# Altium PCB PCB_boost_converter_1_2024-08-31.pcbdoc
Units mm, origin at the board's own origin, x right, y up, seen from the top; angles counter-clockwise.
Board outline 70.87 x 79.5 mm, 2 copper layers (Top Layer, Bottom Layer); 25 components, 17 nets, 61 pads, 193 vias.
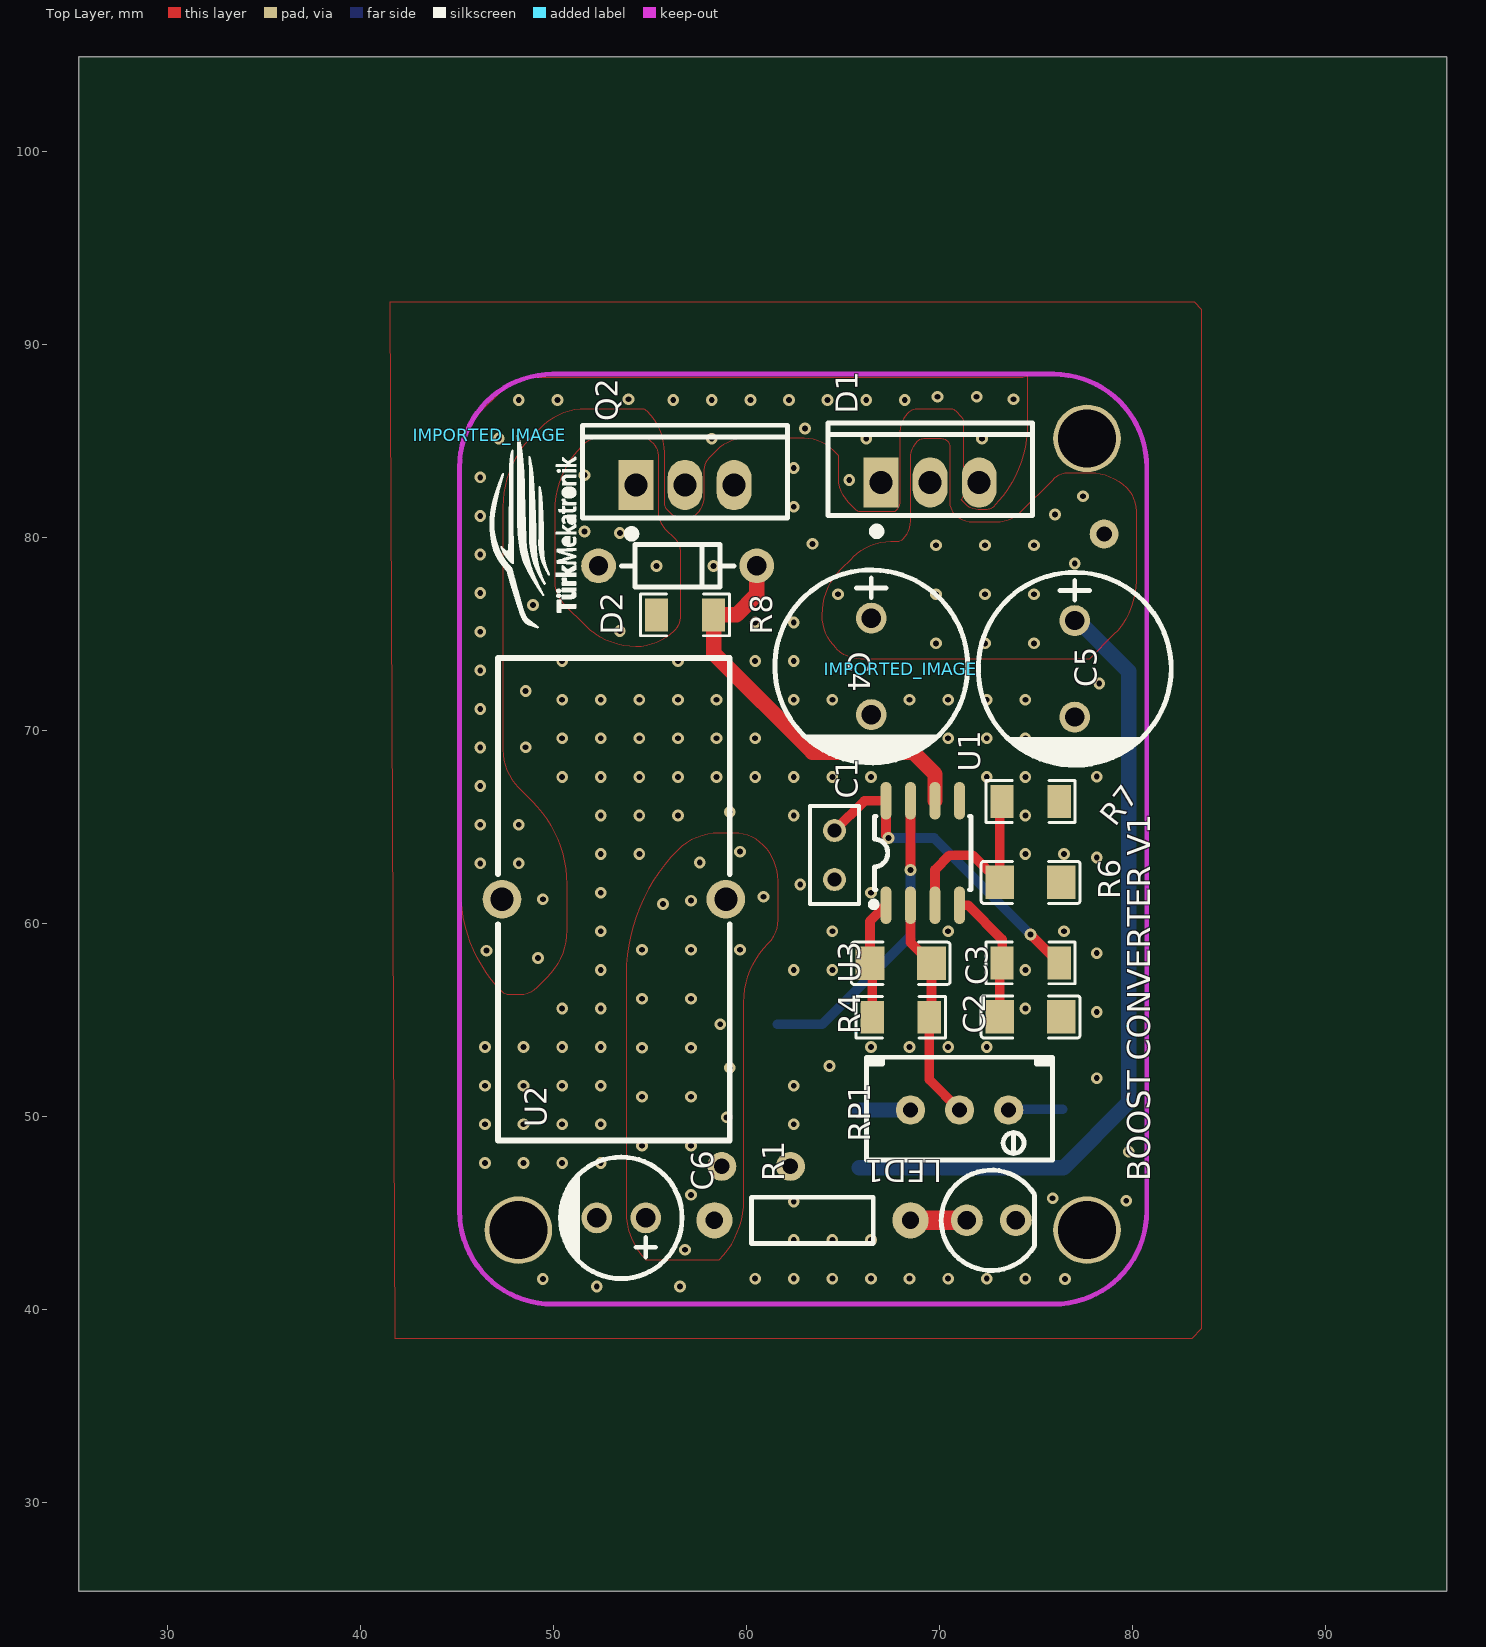
[diagram p0: Top Layer view]
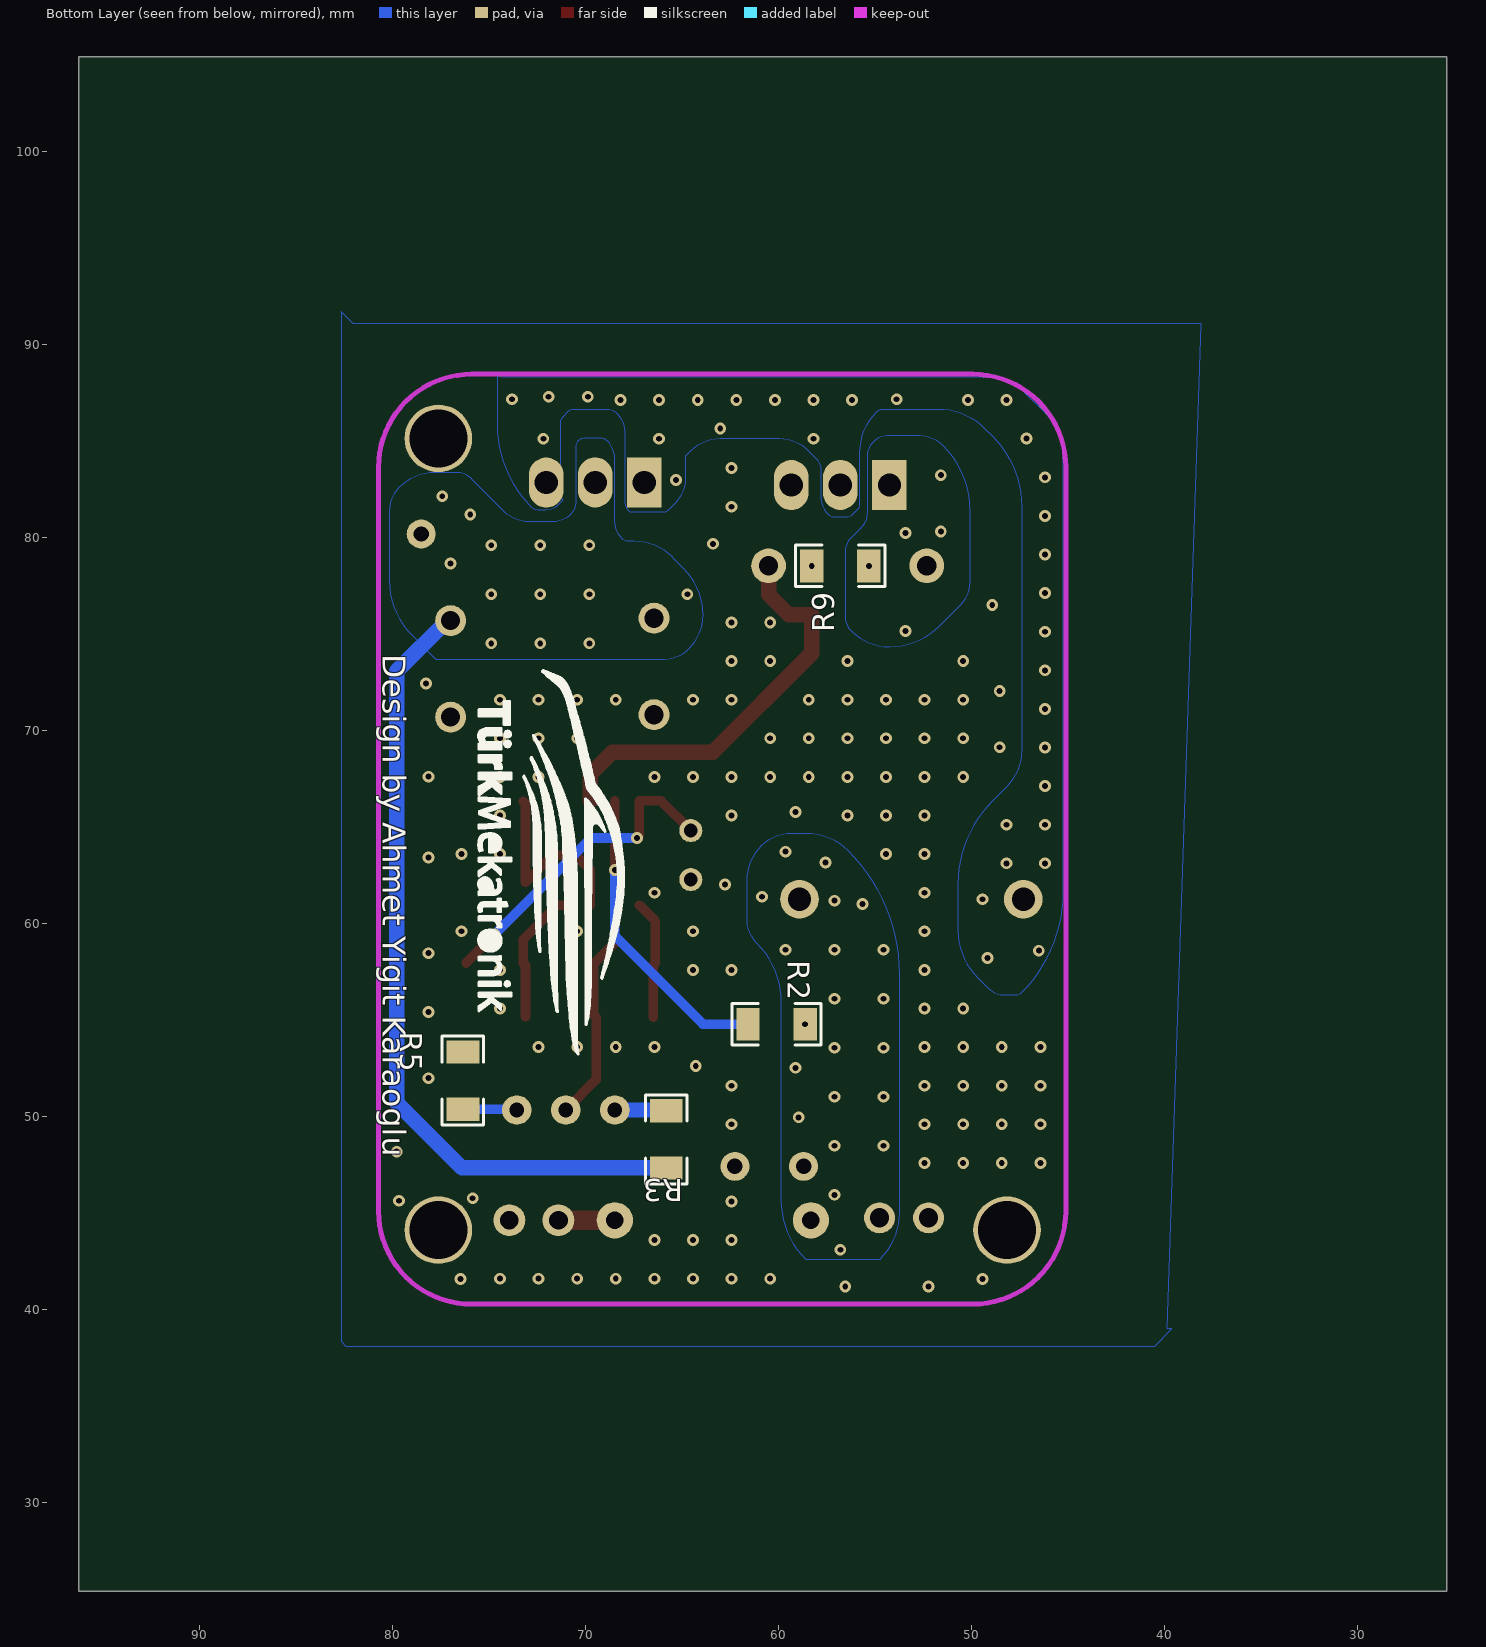
[diagram p1: Bottom Layer view, seen from below]

## Layer stack, top to bottom
Top Layer: signal copper (thickness not stored)
Dielectric: dielectric 0.32, FR-4, Dk 4.8
Bottom Layer: signal copper (thickness not stored)

## Board outline
96.266,25.4 25.4,25.4 25.4,104.902 96.266,104.902

## Components (designator, comment, footprint, x,y, rotation, side; value= is the part's Value field where it differs from the comment)
C1 "100nF" RAD-0.1 64.556,63.54 r90 top
C2 "2.2nF" C1206 74.716,55.158 r180 top
C3 "100nF" C1206 74.716,62.125 r180 top
C4 "100uF" CAP-TH_BD10.0-P5.00-D0.6-FD 66.461,73.319 r270 top
C5 "100uF" CAP-TH_BD10.0-P5.00-D0.6-FD 77.002,73.192 r270 top
C6 "100uF" CAP-TH_BD6.3-P2.50-D1.0-FD 53.507,44.744 r180 top
D1 "MBR20100CL" TO-220-3_L10.0-W4.5-P2.54-L 69.509,82.844 r0 top
D2 "PH1N4148TB" DO-35_BD2.0-L4.2-P8.20-D0.5-R-RD 56.428,78.526 r180 top
IMPORTED_IMAGE "IMPORTED_IMAGE" IMPORTED_IMAGE 67.975,73.158 r0 top
IMPORTED_IMAGE "IMPORTED_IMAGE" IMPORTED_IMAGE 46.686,85.303 r0 top
LED1 "LED-TH-5mm_R" LED-TH_BD5.0_RED 72.684,44.617 r90 top
Q2 "IRF3205PBF" TO-220-3_L10.0-W4.5-P2.54-L 56.809,82.717 r0 top
R1 "1k" R_AXIAL-0.4 63.413,44.617 r180 top
R2 "10" R1206#1 60.111,54.777 r0 bottom
R3 "1k" R1206#1 65.826,48.808 r90 bottom
R4 "100k" R1206#2 67.985,55.14 r0 top
R5 "1k" R1206#1 76.367,51.856 r90 bottom
R6 "1k" R1206#2 74.716,57.952 r0 top
R7 "10k" R1206#2 74.716,66.316 r180 top
R8 "10" R1206#2 56.809,75.986 r0 top
R9 "100k" R1206#1 56.809,78.526 r0 bottom
RP1 "10k" RES-ADJ-TH_3296W 71.033,50.332 r270 top
U1 "UC3845BDTR(XBLW)" SOIC-8_L5.0-W4.0-P1.27-LS6.0-BL 69.128,63.649 r0 top
U2 "150UH/3A" 150UH/3A 53.126,61.254 r90 top
U3 "100nF" C1206 67.985,57.934 r180 top

## Footprints (in the part's own frame and the unit in brackets; to place one, negate y for a bottom-side part, rotate by r counter-clockwise, add the part's x,y. Pads: shape width x height; smd on the part's side, far side on the other; paste and mask are expansions set on the pad)
150UH/3A [mm]
  round 2 hole 1.199 paste+0 mask+0.05: 1(0,-5.8)
  round 2 hole 1.2 paste+0 mask+0.05: 2(0,5.8)
  silkscreen extent -12.5,-6 12.5,6
C1206 [mm]
  rect 1.485x1.728 smd paste-100 mask+0.051: 1(-1.593,0) 2(1.593,0)
  silkscreen extent -2.56,-1.09 2.56,1.09
CAP-TH_BD6.3-P2.50-D1.0-FD [mm]
  round 1.6 hole 1 paste+0 mask+0.051: 1(-1.27,0) 2(1.27,0)
  silkscreen extent -3.15,-3.15 3.17,3.15
CAP-TH_BD10.0-P5.00-D0.6-FD [mm]
  round 1.6 hole 1 paste+0 mask+0.05: 1(-2.5,0) 2(2.5,0)
  silkscreen extent -5,-5 5.08,5
DO-35_BD2.0-L4.2-P8.20-D0.5-R-RD [mm]
  round 1.8 hole 1 paste+0 mask+0.051: 1(4.1,0) 2(-4.1,0)
  silkscreen extent -2.92,-1.1 2.92,1.1
IMPORTED_IMAGE [mm]
LED-TH_BD5.0_RED [mil]
  round 65 hole 38 paste+0 mask+2: 1(0,50) 2(0,-50)
  silkscreen extent -102,-88 102,102
R1206#1 [mm]
  rect 1.208x1.701 smd paste-100 mask+0.051: 1(1.479,0) 2(-1.479,0)
  silkscreen extent -2.31,-1.08 2.31,1.08
R1206#2 [mm]
  rect 1.208x1.701 smd paste-100 mask+0.051: 1(-1.479,0) 2(1.479,0)
  silkscreen extent -2.31,-1.08 2.31,1.08
R_AXIAL-0.4 [mil]
  round 74 hole 35.4 paste+0 mask+2: 1(-200,0) 2(200,0)
  silkscreen extent -124,-47 124,47
RAD-0.1 [mil]
  round 47 hole 28 paste+0 mask+2: 1(-50,0) 2(50,0)
  silkscreen extent -100,-50 100,50
RES-ADJ-TH_3296W [mil]
  round 60 hole 30 paste+0 mask+2: 1(0,100.01) 2(0,0.01) 3(0,-99.99)
  silkscreen extent -108,-190 102,190
SOIC-8_L5.0-W4.0-P1.27-LS6.0-BL [mil]
  oval 22.38x76.78 smd paste+0 mask+2: 1(-75,-106.5) 2(-25,-106.5) 3(25,-106.5) 4(75,-106.5) 5(75,106.5) 6(25,106.5) 7(-25,106.5) 8(-75,106.5)
  silkscreen extent -106,-111 98,75
TO-220-3_L10.0-W4.5-P2.54-L [mm]
  rect 1.8x2.6 hole 1.2 paste+0 mask+0.051: 1(-2.54,0.005)
  oval 1.8x2.6 hole 1.2 paste+0 mask+0.051: 2(0,0.005) 3(2.54,-0.005)
  silkscreen extent -5.3,-2.73 5.3,3.09

## Free pads (board coordinates)
  round 3.5 hole 3 paste+0 mask+0.051: 4(48.173,44.109) 4(77.637,44.108) 4(77.637,85.13)
  round 1.5 hole 0.8 paste+0 mask+0.051: 5(58.714,47.411) 5(62.27,47.411) 5(78.526,80.177)

## Via types
v1: diameter 0.61, hole 0.305, Top Layer to Bottom Layer, tented both sides, 189 vias
v2: diameter 0.62, hole 0.31, Top Layer to Bottom Layer, tented both sides, 4 vias

## Nets (pads, with @x,y where several pads share a name; then routed paths per layer and width w, separated by ;. In a path a pad name is that pad's centre, name@x,y a point inside that pad or via, vN(x,y) a via of type N, cw(c..) or ccw(c..) an arc to the next point about the centre after c; other vN are vias at no path point)
D1_1: D1.1 D1.3 Q2.2 U2.2
  other v1: 49.189,58.206 46.522,58.587 49.443,61.254 46.198,63.114 48.198,63.114 46.198,65.114 48.198,65.114 46.198,67.114 46.198,69.114 46.198,71.114 46.198,73.114 46.198,75.114 46.198,77.114 46.198,79.114 46.198,81.114 65.318,82.971 46.198,83.114 58.197,85.114 66.197,85.114 72.197,85.114 47.157,85.13 63.032,85.638 48.198,87.114 50.198,87.114 56.197,87.114 58.197,87.114 60.197,87.114 62.197,87.114 64.197,87.114 66.197,87.114 68.197,87.114 53.888,87.162 73.827,87.162 69.89,87.289 71.922,87.289
GND: C1.1 C2.1 C3.1 C4.2 C5.2 C6.2 LED1.2 pad.5@62.27,47.411 Q2.3 R5.1 R7.1 R9.1 U1.5
  other v1: 52.237,41.188 56.555,41.188 49.443,41.569 60.443,41.591 62.443,41.591 64.443,41.591 66.443,41.591 68.443,41.591 70.443,41.591 72.443,41.591 74.443,41.591 76.494,41.569 62.443,43.591 64.443,43.591 66.443,43.591 62.443,45.591 79.669,45.633 75.859,45.76 46.443,47.591 48.443,47.591 50.443,47.591 52.443,47.591 79.796,48.173 46.443,49.591 48.443,49.591 50.443,49.591 52.443,49.591 62.443,49.591 46.443,51.591 48.443,51.591 50.443,51.591 52.443,51.591 62.443,51.591 78.145,51.983 64.302,52.618 46.443,53.591 48.443,53.591 50.443,53.591 52.443,53.591 66.443,53.591 68.443,53.591 70.443,53.591 72.443,53.591 78.145,55.412 50.443,55.591 52.443,55.591 74.443,55.591 52.443,57.591 62.443,57.591 64.443,57.591 74.443,57.591 78.145,58.46 52.443,59.591 64.443,59.591 70.443,59.591 76.443,59.591 52.443,61.591 66.443,61.591 62.778,62.016 78.145,63.413 52.443,63.591 54.443,63.591 74.443,63.591 76.443,63.591 52.443,65.591 54.443,65.591 56.443,65.591 62.443,65.591 74.443,65.591 59.126,65.774 50.443,67.591 52.443,67.591 54.443,67.591 56.443,67.591 58.443,67.591 60.443,67.591 62.443,67.591 64.443,67.591 66.443,67.591 72.443,67.591 74.443,67.591 78.145,67.604 48.554,69.128 50.443,69.591 52.443,69.591 54.443,69.591 56.443,69.591 58.443,69.591 60.443,69.591 70.443,69.591 72.443,69.591 74.443,69.591 50.443,71.591 52.443,71.591 54.443,71.591 56.443,71.591 58.443,71.591 62.443,71.591 64.443,71.591 68.443,71.591 70.443,71.591 72.443,71.591 74.443,71.591 48.554,72.049 78.272,72.43 50.443,73.591 56.443,73.591 60.443,73.591 62.443,73.591 60.443,75.591 62.443,75.591 48.935,76.494 58.288,78.526 63.413,79.669 62.443,81.591 62.443,83.591
OUTPUT: D2.2 R8.2 U1.6 | length 21.6
  Top Layer w0.8: D2.2 60.528,77.037 59.476,75.986 R8.2 58.288,73.999 63.413,68.874 68.62,68.874 69.763,67.731 U1.6
Q2_1: D2.1 Q2.1 R8.1 R9.2
  other v1: 53.431,75.148 53.431,80.228 51.602,80.304 51.602,83.225
  other v2: 55.331,78.526
R1_1: LED1.1 R1.1 | length 2.9
  Top Layer w1: R1.1 LED1.1
R3_1: R3.1 RP1.3 | length 2.7
  Bottom Layer w0.8: R3.1 65.872,50.332 RP1.3
RP1_1: R5.2 RP1.1 | length 2.8
  Bottom Layer w0.5: RP1.1 73.619,50.377 R5.2
RT/CT: C2.2 R6.1 U1.4 | length 7
  Top Layer w0.5: U1.4 71.47,60.944 73.238,59.176 R6.1 ; C2.2 73.124,57.838 R6.1
S$133: 
S$1126: 
U1_1: R4.1 U1.1 U3.2 | length 6.2
  Top Layer w0.5: R4.1 66.507,57.82 U3.2 66.393,60.113 U1.1
U1_2: R4.2 RP1.2 U1.2 U3.1 | length 11.8
  Top Layer w0.5: U1.2 68.493,59.019 U3.1 69.578,55.254 R4.2 69.464,51.901 RP1.2
U1_3: C3.2 R7.2 U1.3 | length 10.3
  Top Layer w0.5: U1.3 69.763,62.778 70.525,63.54 71.709,63.54 C3.2 ; C3.2 73.123,66.202 R7.2
U1_8: C1.2 R6.2 U1.8 | length 16.9
  Top Layer w0.5: C1.2 66.101,66.354 U1.8 67.223,64.556 v2(67.35,64.429) ; v2@74.716,59.476 v2(74.716,59.43) R6.2
  Bottom Layer w0.5: v2(67.35,64.429) 69.718,64.429 v2(74.716,59.43)
VCC: R2.1 U1.7 | length 15.8
  Top Layer w0.5: v2(68.493,62.778) U1.7
  Bottom Layer w0.5: R2.1 63.921,54.777 68.493,59.349 v2(68.493,62.778)
VIN: C6.1 pad.5@58.714,47.411 R1.2 R2.2 U2.1
  other v1: 56.809,43.093 57.114,45.938 54.574,48.478 57.114,48.478 58.968,49.951 54.574,51.018 57.114,51.018 59.126,52.517 54.574,53.558 57.114,53.558 58.633,54.777 54.574,56.098 57.114,56.098 54.574,58.638 57.114,58.638 59.654,58.638 55.666,61 57.114,61.178 60.873,61.381 57.571,63.159 59.654,63.718
VOUT: C4.1 C5.1 D1.2 pad.5@78.526,80.177 R3.2 | length 41.6
  Bottom Layer w0.8: R3.2 76.413,47.329 79.796,50.713 79.796,73.065 77.169,75.691 C5.1
  other v1: 69.815,74.513 72.355,74.513 74.895,74.513 64.735,77.053 69.815,77.053 72.355,77.053 74.895,77.053 77.002,78.653 69.815,79.593 72.355,79.593 74.895,79.593 75.986,81.193 77.435,82.133

## Polygon pours and split planes (outlines as drawn)
Q2_1 on Bottom Layer (solid): 56.301,75.224 56.221,75.143 cw(c54.269,77.094) 54.269,74.335 cw(c54.269,78.014) 51.668,75.412 50.586,76.494 cw(c51.813,77.72) 50.078,77.72 50.078,79.288 50.078,81.376 cw(c54.848,81.376) 51.475,84.749 cw(c52.702,83.522) 52.702,85.257 54.396,85.257 cw(c54.396,84.337) 55.047,84.987 55.158,84.876 cw(c54.545,84.262) 55.412,84.262 55.412,81.32 ccw(c56.639,81.32) 55.772,80.452 56.301,79.923 cw(c55.688,79.309) 56.555,79.309 56.555,77.764 56.555,75.837 cw(c55.688,75.837) 56.301,75.224
VIN on Bottom Layer (solid): 58.587,42.585 ccw(c55.521,45.651) 59.857,45.651 59.857,54.523 59.857,55.901 cw(c64.193,55.901) 61.127,58.968 ccw(c59.901,60.194) 61.635,60.194 61.635,61.762 61.635,62.208 ccw(c59.034,62.208) 60.873,64.048 ccw(c59.34,62.515) 59.34,64.683 58.841,64.683 58.575,64.683 ccw(c58.575,61.647) 56.428,63.794 ccw(c62.867,57.355) 53.761,57.355 53.761,47.284 53.761,45.037 ccw(c57.23,45.037) 54.777,42.585 58.587,42.585
VOUT on Bottom Layer (solid): 77.637,73.7 65.91,73.7 cw(c65.91,75.434) 64.683,74.208 64.64,74.251 cw(c66.374,75.986) 63.921,75.986 cw(c67.294,75.986) 64.909,78.37 65.445,78.907 65.526,78.987 cw(c67.477,77.036) 67.477,79.796 67.806,79.796 ccw(c67.806,80.229) 68.112,79.923 ccw(c67.193,80.842) 68.493,80.842 68.493,83.098 68.493,84.083 cw(c69.794,84.083) 68.874,85.003 cw(c69.181,84.696) 69.181,85.13 69.763,85.13 70.092,85.13 cw(c70.092,84.696) 70.398,85.003 cw(c70.092,84.696) 70.525,84.696 70.525,81.955 70.525,81.806 ccw(c71.393,81.806) 70.779,81.193 ccw(c71.699,82.112) 71.699,80.812 72.938,80.812 ccw(c72.938,82.651) 74.239,81.35 75.859,82.971 75.971,83.082 cw(c76.621,82.432) 76.621,83.352 77.83,83.352 cw(c77.83,80.75) 79.669,82.59 cw(c78.443,81.363) 80.177,81.363 80.177,77.764 cw(c76.192,77.764) 79.01,74.945 77.764,73.7
D1_1 on Bottom Layer (solid): 74.589,88.432 74.589,85.866 cw(c68.519,85.866) 72.811,81.574 cw(c72.505,81.88) 72.505,81.447 72.049,81.447 cw(c72.049,82.366) 71.399,81.716 71.16,81.955 ccw(c70.854,82.261) 71.287,82.261 71.287,86.019 ccw(c70.981,86.019) 71.198,86.235 70.906,86.527 ccw(c70.6,86.22) 70.6,86.654 68.874,86.654 ccw(c68.874,86.04) 68.441,86.474 68.366,86.4 ccw(c69.286,85.48) 67.985,85.48 67.985,82.844 67.985,81.933 cw(c67.118,81.933) 67.731,81.32 65.953,81.32 cw(c65.953,81.626) 65.737,81.409 65.318,81.828 cw(c66.545,83.054) 64.81,83.054 64.81,84.241 64.556,84.495 ccw(c63.023,82.962) 63.023,85.13 59.984,85.13 ccw(c59.984,82.983) 58.467,84.501 58.079,84.114 ccw(c58.693,83.5) 57.825,83.5 57.825,82.209 57.825,82.112 cw(c56.525,82.112) 57.444,81.193 cw(c57.138,81.499) 57.138,81.066 56.555,81.066 cw(c56.555,81.679) 56.122,81.245 55.92,81.447 cw(c56.227,81.753) 55.793,81.753 55.793,84.368 55.793,84.38 ccw(c52.758,84.38) 54.904,86.527 ccw(c54.598,86.22) 54.598,86.654 51.729,86.654 ccw(c51.729,83.281) 49.345,85.666 48.935,85.257 ccw(c52.615,81.577) 47.411,81.577 47.411,69.001 ccw(c50.171,69.001) 48.22,67.049 48.935,66.334 cw(c44.643,62.041) 50.713,62.041 50.713,61.381 50.713,59.642 cw(c47.245,59.642) 49.697,57.19 49.168,56.66 cw(c48.3,57.527) 48.3,56.301 47.718,56.301 cw(c47.718,56.734) 47.411,56.428 cw(c52.624,61.64) 45.252,61.64 45.252,72.176 45.252,84.433 cw(c47.854,84.433) 46.014,86.273 47.508,87.766 cw(c48.808,86.465) 48.808,88.305 74.283,88.305 ccw(c74.283,88.738) 74.589,88.432
GND on Bottom Layer (solid): 38.1,91.059 82.042,91.059 82.677,91.694 82.677,38.354 82.423,38.1 40.513,38.1 39.624,38.989 39.878,38.989
Q2_1 on Top Layer (solid): 56.301,75.224 56.221,75.143 cw(c54.269,77.094) 54.269,74.335 cw(c54.269,78.014) 51.668,75.412 50.586,76.494 cw(c51.813,77.72) 50.078,77.72 50.078,79.288 50.078,81.376 cw(c54.848,81.376) 51.475,84.749 cw(c52.702,83.522) 52.702,85.257 54.396,85.257 cw(c54.396,84.337) 55.047,84.987 55.158,84.876 cw(c54.545,84.262) 55.412,84.262 55.412,81.32 ccw(c56.639,81.32) 55.772,80.452 56.301,79.923 cw(c55.688,79.309) 56.555,79.309 56.555,77.764 56.555,75.837 cw(c55.688,75.837) 56.301,75.224
VIN on Top Layer (solid): 58.587,42.585 ccw(c55.521,45.651) 59.857,45.651 59.857,54.523 59.857,55.901 cw(c64.193,55.901) 61.127,58.968 ccw(c59.901,60.194) 61.635,60.194 61.635,61.762 61.635,62.208 ccw(c59.034,62.208) 60.873,64.048 ccw(c59.34,62.515) 59.34,64.683 58.841,64.683 58.575,64.683 ccw(c58.575,61.647) 56.428,63.794 ccw(c62.867,57.355) 53.761,57.355 53.761,47.284 53.761,45.037 ccw(c57.23,45.037) 54.777,42.585 58.587,42.585
VOUT on Top Layer (solid): 77.637,73.7 65.91,73.7 cw(c65.91,75.434) 64.683,74.208 64.64,74.251 cw(c66.374,75.986) 63.921,75.986 cw(c67.294,75.986) 64.909,78.37 65.445,78.907 65.526,78.987 cw(c67.477,77.036) 67.477,79.796 67.806,79.796 ccw(c67.806,80.229) 68.112,79.923 ccw(c67.193,80.842) 68.493,80.842 68.493,83.098 68.493,84.083 cw(c69.794,84.083) 68.874,85.003 cw(c69.181,84.696) 69.181,85.13 69.763,85.13 70.092,85.13 cw(c70.092,84.696) 70.398,85.003 cw(c70.092,84.696) 70.525,84.696 70.525,81.955 70.525,81.806 ccw(c71.393,81.806) 70.779,81.193 ccw(c71.699,82.112) 71.699,80.812 72.938,80.812 ccw(c72.938,82.651) 74.239,81.35 75.859,82.971 75.971,83.082 cw(c76.621,82.432) 76.621,83.352 77.83,83.352 cw(c77.83,80.75) 79.669,82.59 cw(c78.443,81.363) 80.177,81.363 80.177,77.764 cw(c76.192,77.764) 79.01,74.945 77.764,73.7
D1_1 on Top Layer (solid): 74.548,88.432 74.548,85.866 cw(c68.477,85.866) 72.77,81.574 cw(c72.463,81.88) 72.463,81.447 72.008,81.447 cw(c72.008,82.366) 71.357,81.716 71.119,81.955 ccw(c70.812,82.261) 71.246,82.261 71.246,86.019 ccw(c70.939,86.019) 71.156,86.235 70.865,86.527 ccw(c70.558,86.22) 70.558,86.654 68.833,86.654 ccw(c68.833,86.04) 68.399,86.474 68.325,86.4 ccw(c69.244,85.48) 67.944,85.48 67.944,82.844 67.944,81.933 cw(c67.076,81.933) 67.69,81.32 65.912,81.32 cw(c65.912,81.626) 65.695,81.409 65.277,81.828 cw(c66.503,83.054) 64.769,83.054 64.769,84.241 64.515,84.495 ccw(c62.982,82.962) 62.982,85.13 59.943,85.13 ccw(c59.943,82.983) 58.425,84.501 58.038,84.114 ccw(c58.651,83.5) 57.784,83.5 57.784,82.209 57.784,82.112 cw(c56.483,82.112) 57.403,81.193 cw(c57.096,81.499) 57.096,81.066 56.514,81.066 cw(c56.514,81.679) 56.08,81.245 55.879,81.447 cw(c56.185,81.753) 55.752,81.753 55.752,84.368 55.752,84.38 ccw(c52.716,84.38) 54.863,86.527 ccw(c54.556,86.22) 54.556,86.654 51.688,86.654 ccw(c51.688,83.281) 49.303,85.666 48.894,85.257 ccw(c52.573,81.577) 47.37,81.577 47.37,69.001 ccw(c50.129,69.001) 48.178,67.049 48.894,66.334 cw(c44.601,62.041) 50.672,62.041 50.672,61.381 50.672,59.642 cw(c47.203,59.642) 49.656,57.19 49.126,56.66 cw(c48.259,57.527) 48.259,56.301 47.676,56.301 cw(c47.676,56.734) 47.37,56.428 cw(c52.582,61.64) 45.211,61.64 45.211,72.176 45.211,84.433 cw(c47.812,84.433) 45.973,86.273 47.466,87.766 cw(c48.767,86.465) 48.767,88.305 74.241,88.305 ccw(c74.241,88.738) 74.548,88.432
GND on Top Layer (solid): 41.529,92.202 83.185,92.202 83.566,91.821 83.566,38.989 83.058,38.481 41.783,38.481

## Keep-outs
Keep-Out Layer:
  lines w0.254: 45.126,45.091 ccw(c49.944,45.091) 49.943,40.273 ; 45.126,83.639 cw(c49.944,83.639) 49.943,88.457 ; 75.918,40.273 ccw(c75.918,45.091) 80.736,45.091 ; 75.918,88.457 cw(c75.918,83.639) 80.736,83.639

## Silkscreen, mask and mechanical layers (free items; w line width, h text height)
Top Overlay:
  text "BOOST CONVERTER V1" at 80.904,46.649 h1.2 r90
Bottom Overlay:
  text "Design by Ahmet Yigit Karaoglu" at 80.523,73.954 h1.2 r90

## Text inside footprints (layer, text, board x,y; h text height)
U2: Document "150uH/3A" at 53.189,53.542 h2.03 r92; Document "12mm" at 56.936,73.954 h2.03 r180